# Altium PCB PCB1.PcbDoc
Units mm, origin at the board's own origin, x right, y up, seen from the top; angles counter-clockwise.
Board outline 70 x 50 mm, 4 copper layers (Top Layer, Layer 2, Layer 3, Bottom Layer), stack 1.536 mm thick; 77 components, 57 nets, 332 pads, 64 vias.
Unrouted connection lines stored in the file: 39.
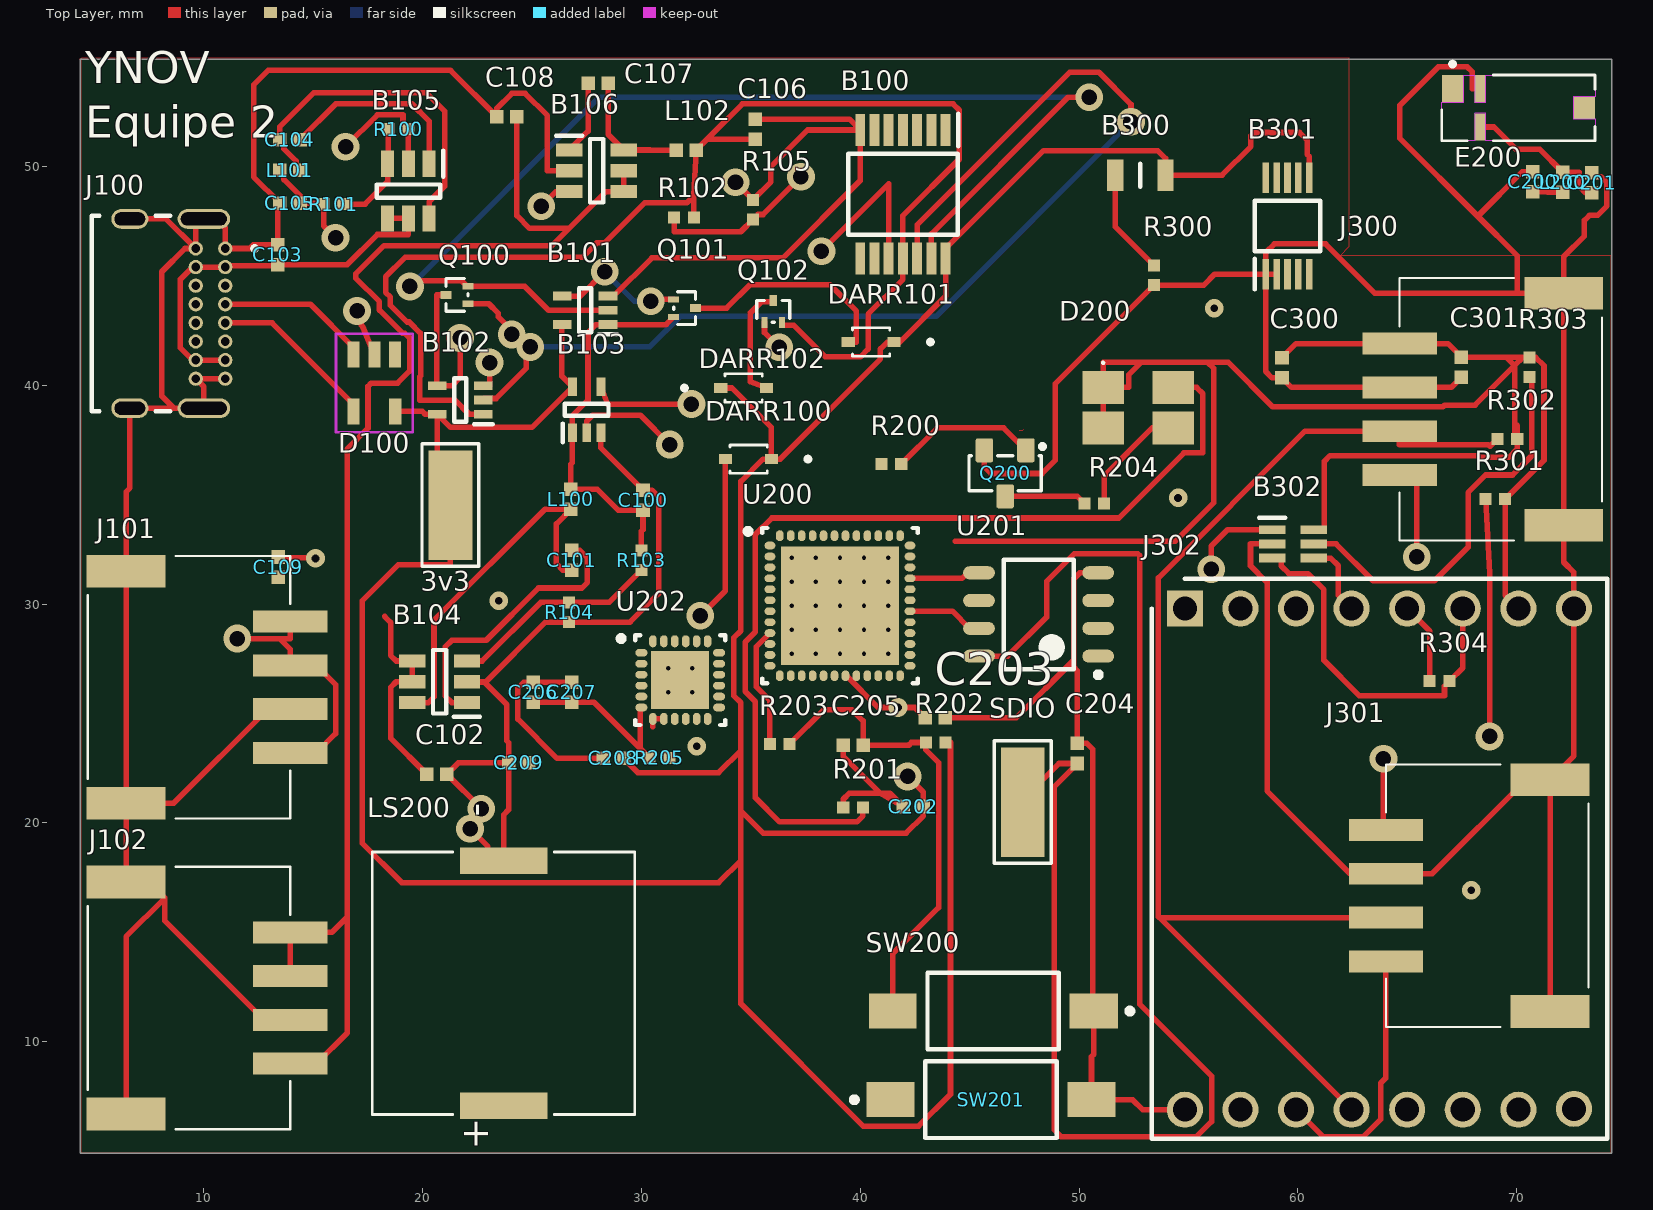
[diagram p0: Top Layer view]
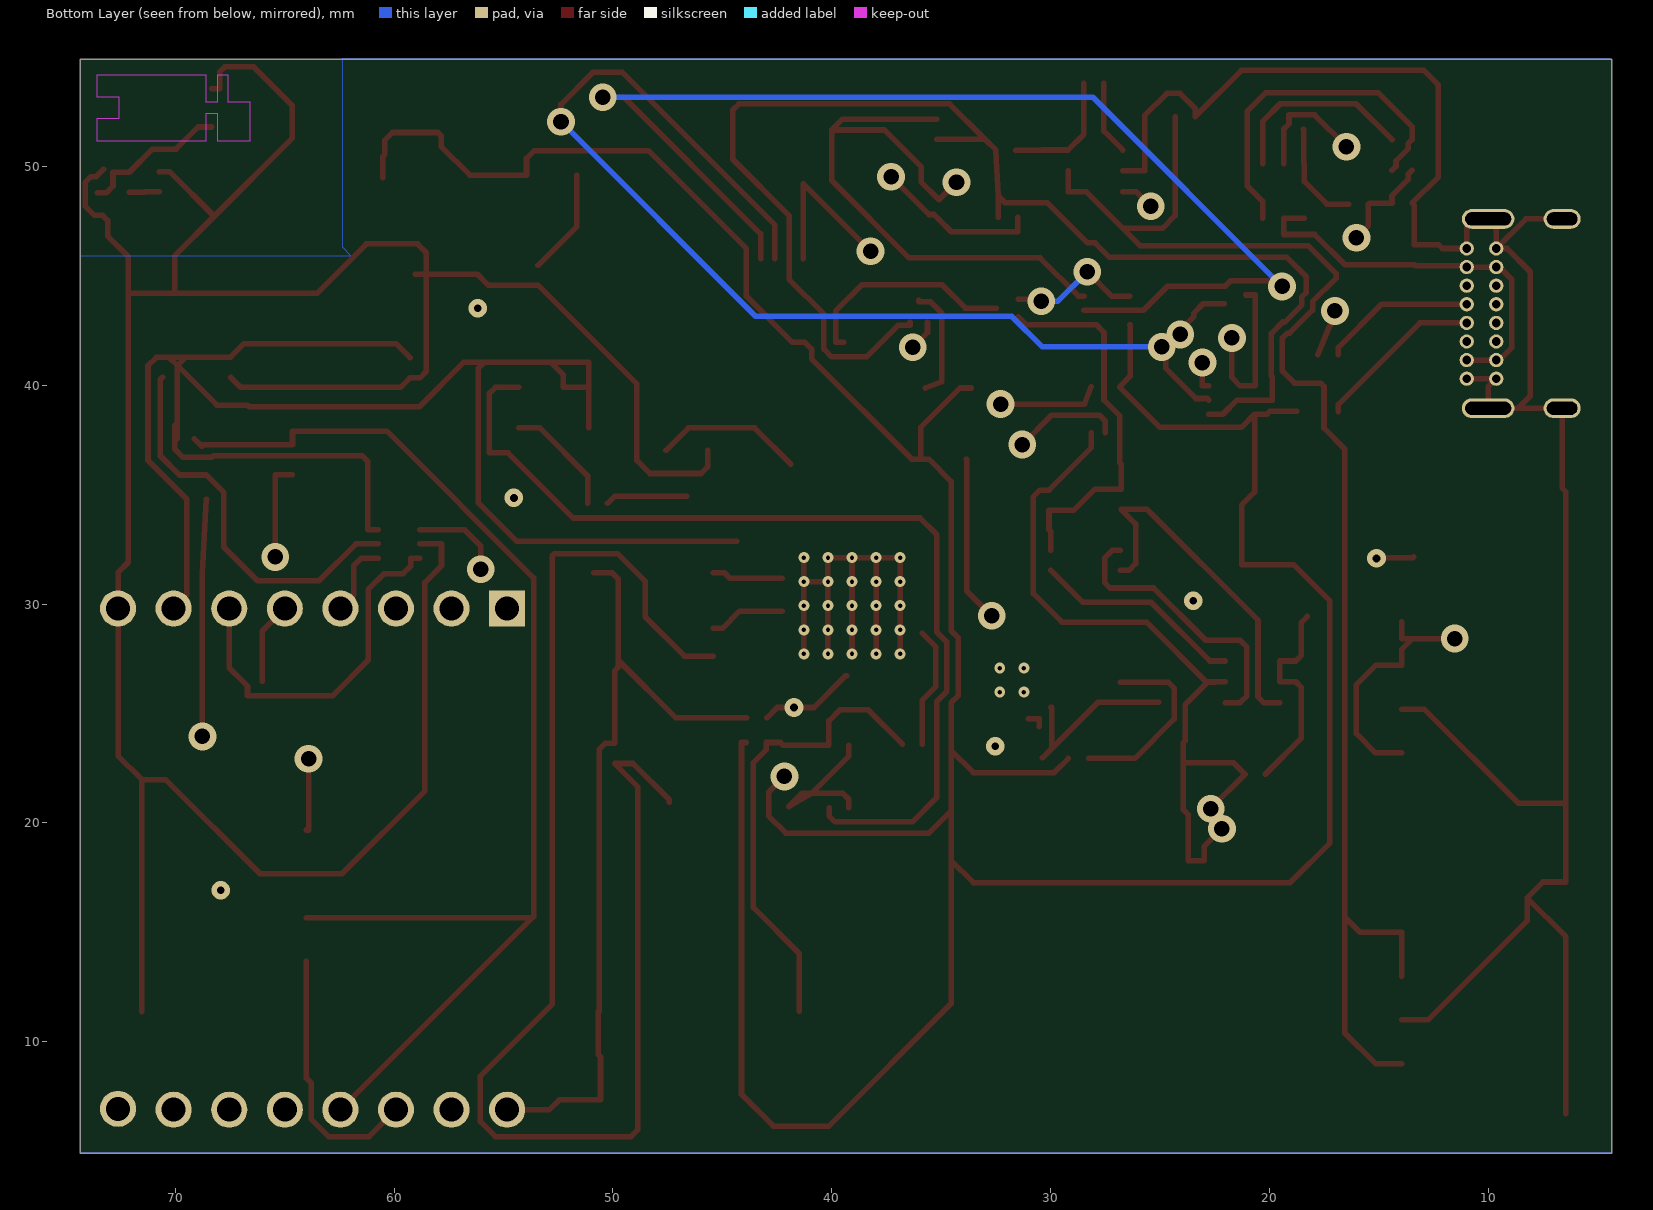
[diagram p1: Bottom Layer view, seen from below]
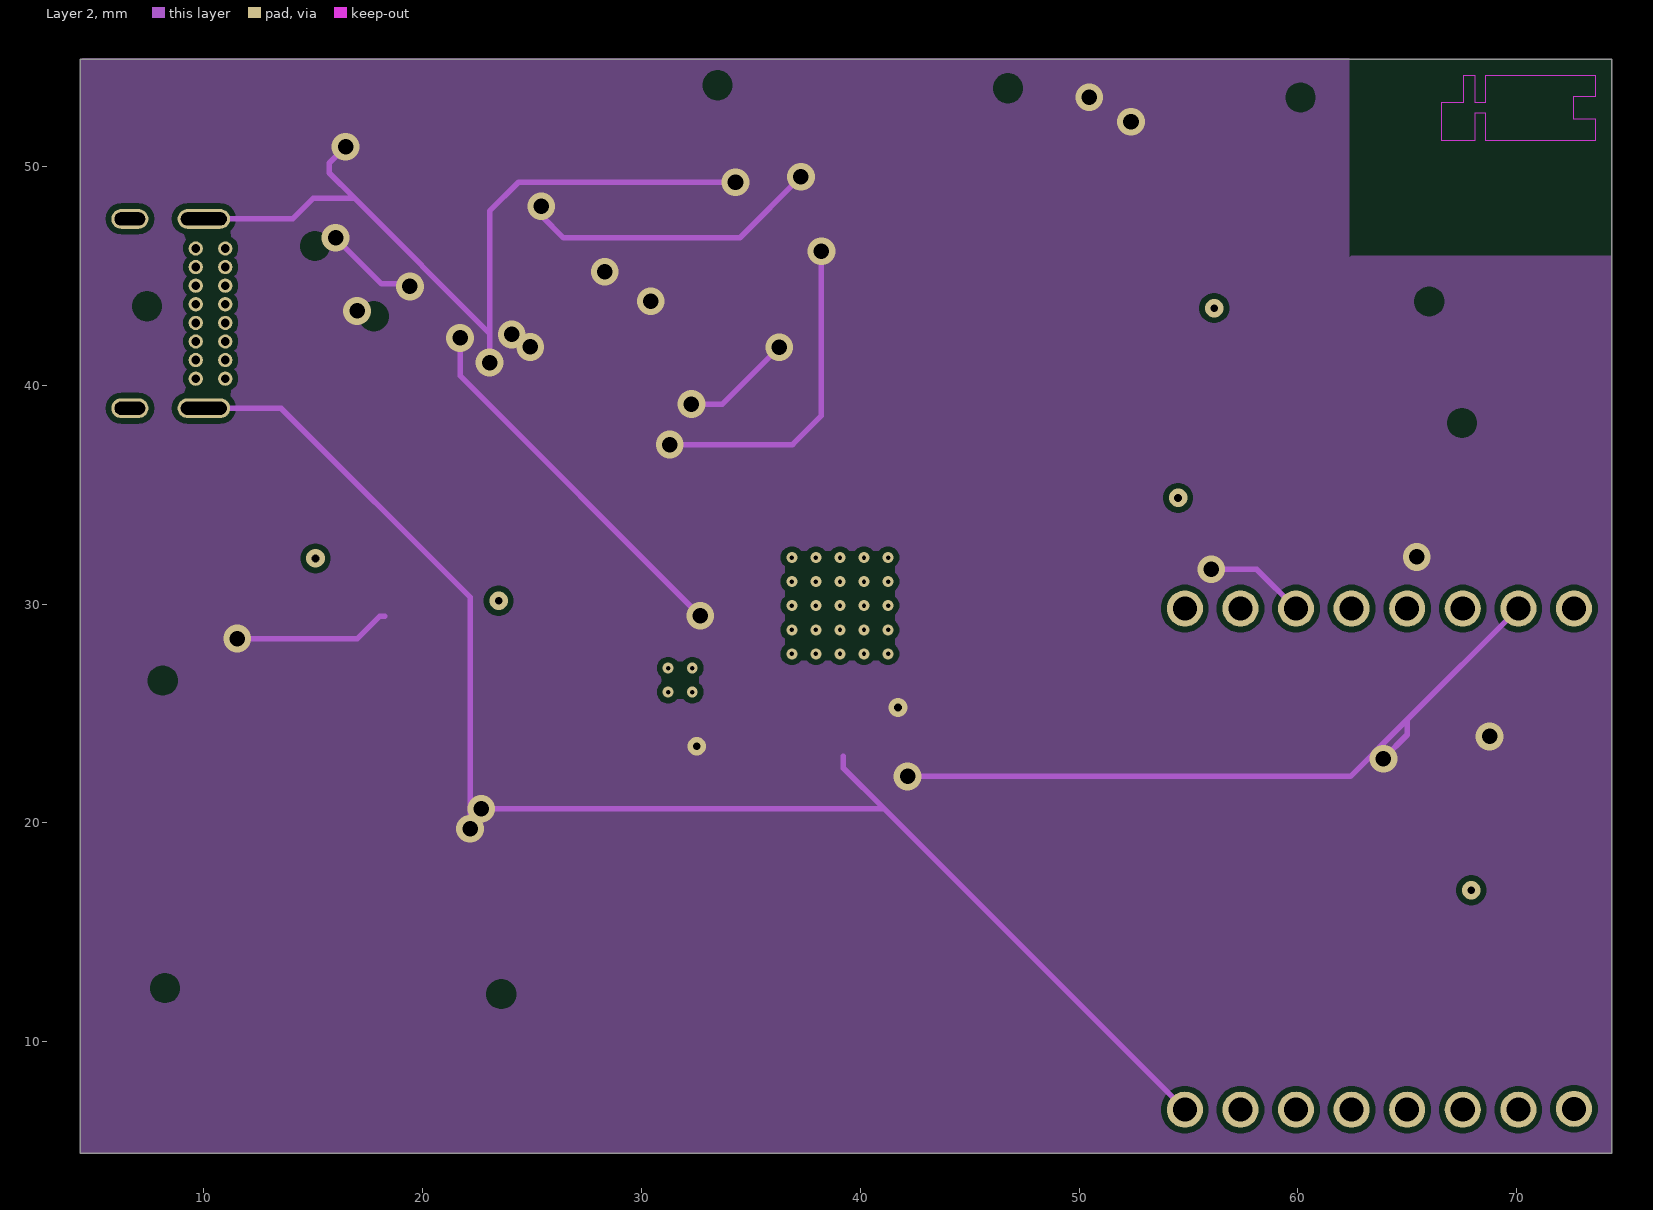
[diagram p2: Layer 2]
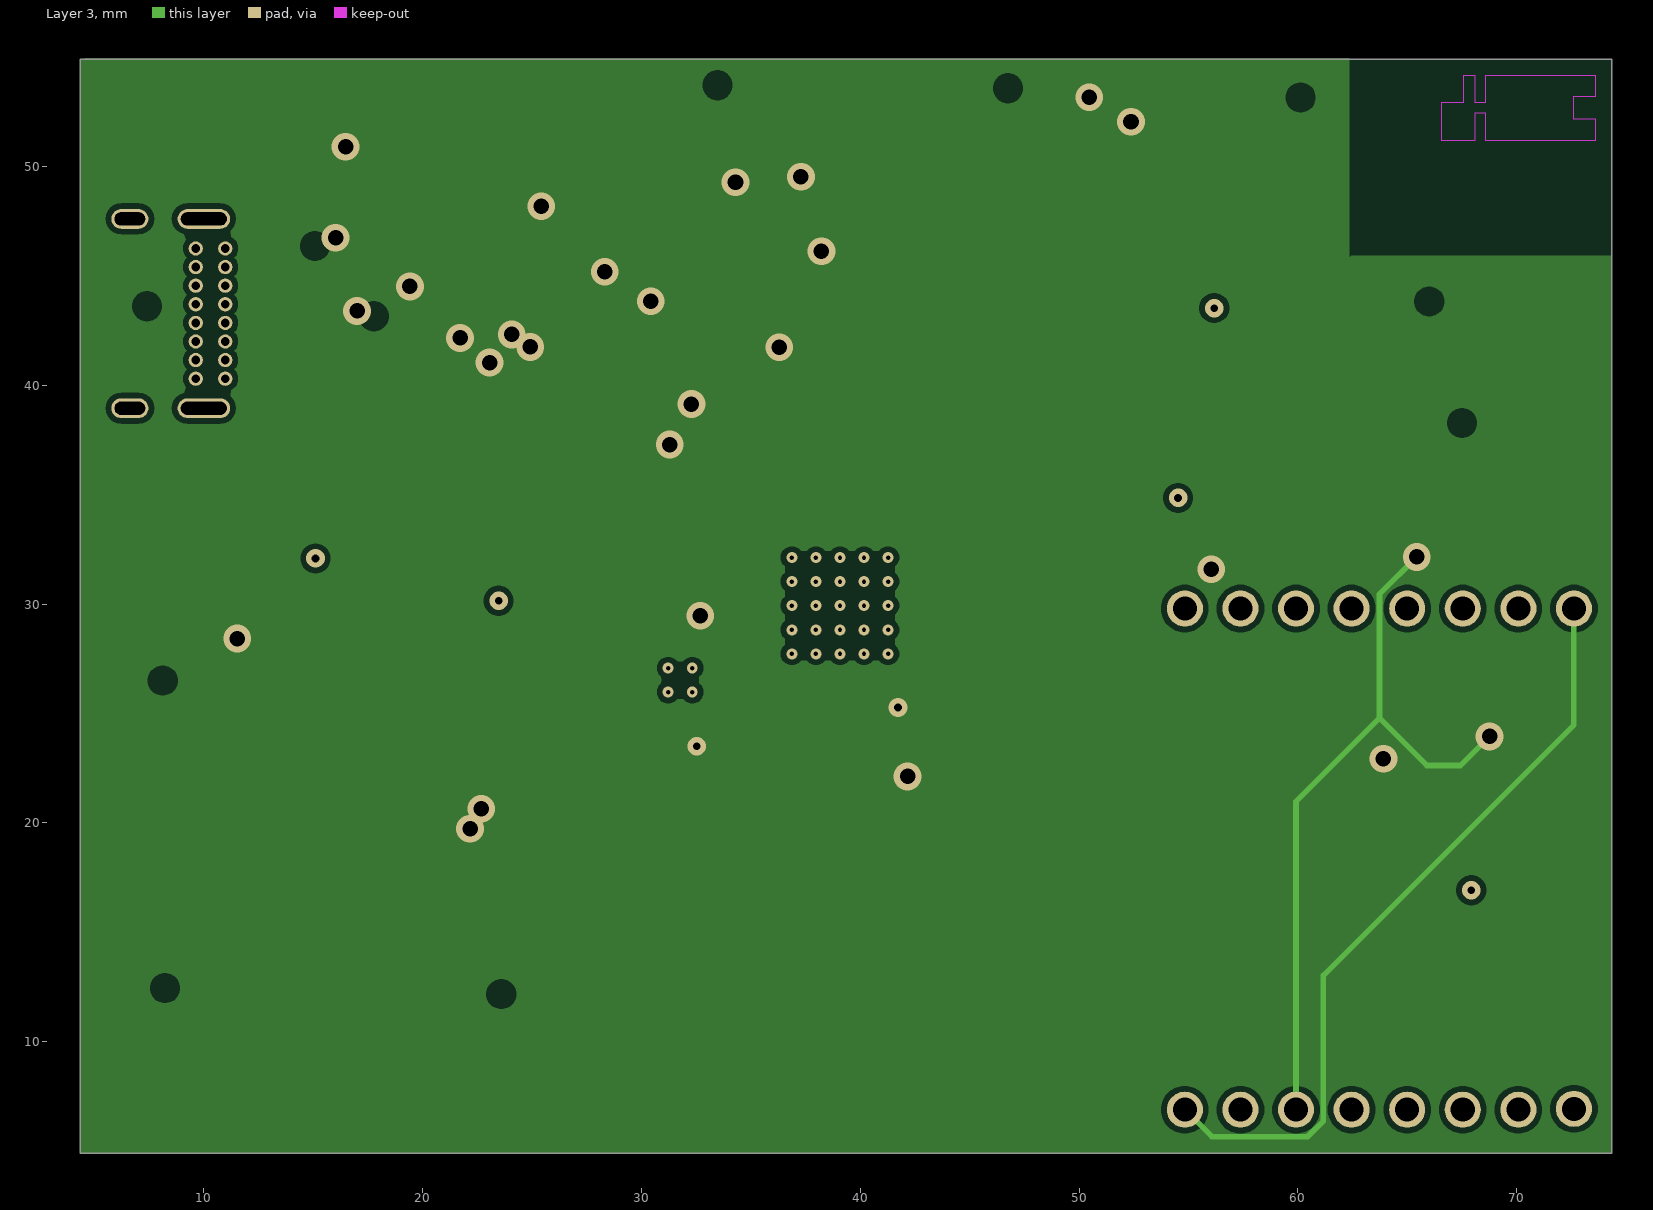
[diagram p3: Layer 3]
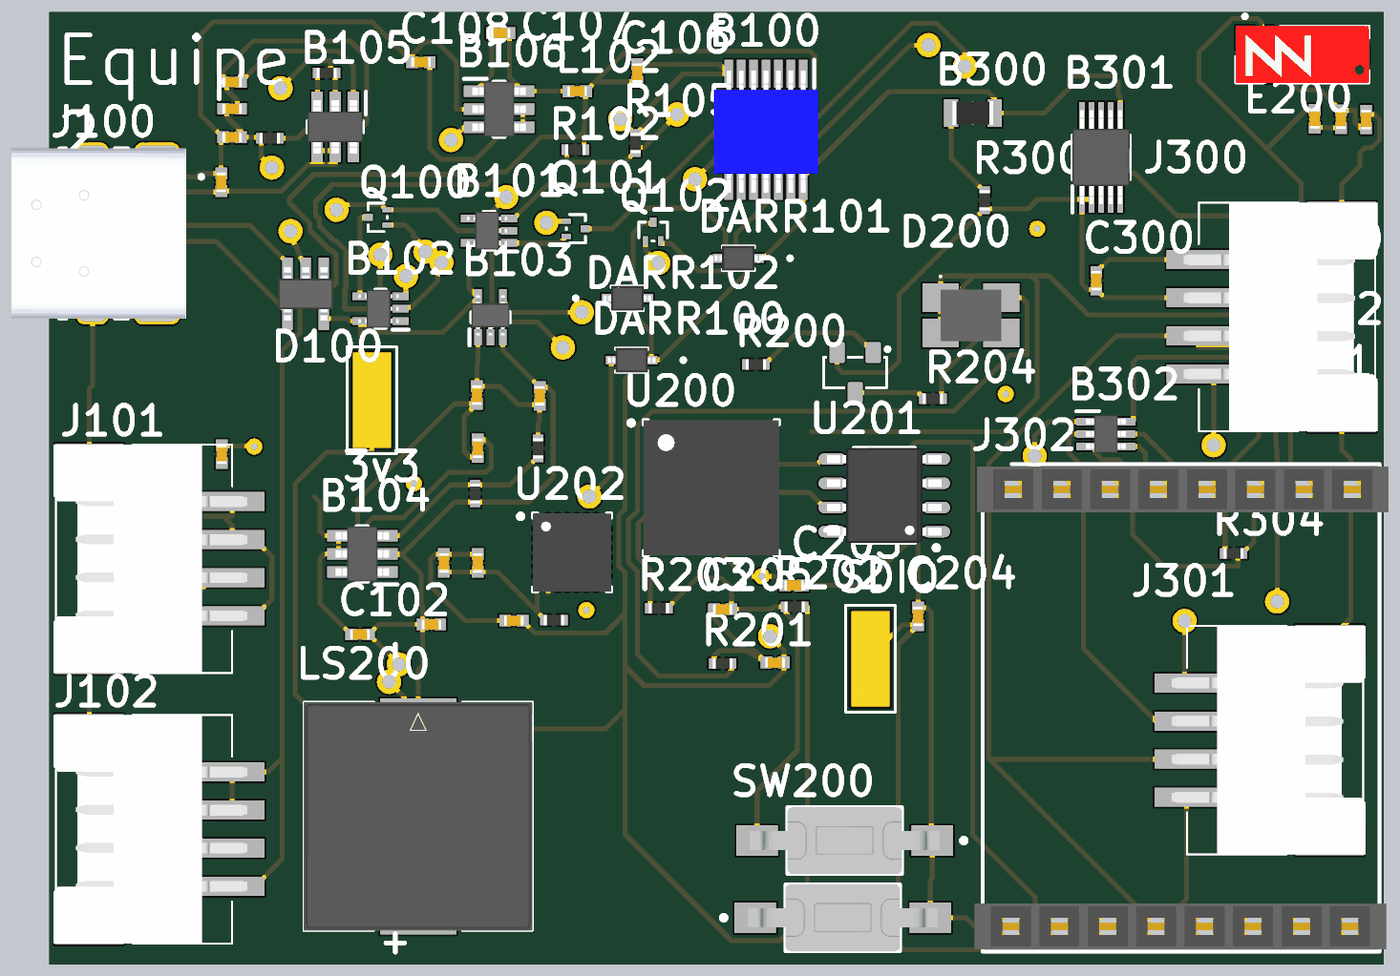
[diagram p4: 3D render of the assembled board from above, using the file's embedded part models]

## Layer stack, top to bottom
Top Solder: solder mask 0.0102, SM-001, Dk 3.5
Top Layer: signal copper 0.018
Dielectric 1: prepreg 0.36, FR-4, Dk 4.8
Layer 2: signal copper 0.035
Dielectric 2: core 0.71, FR-4, Dk 4.8
Layer 3: signal copper 0.035
Dielectric 3: prepreg 0.36, FR-4, Dk 4.8
Bottom Layer: signal copper 0.018
Bottom Solder: solder mask 0.0102, SM-001, Dk 3.5

## Board outline
4.35,4.9 74.35,4.9 74.35,54.9 4.35,54.9

## Design rules (kind name [scope] priority, off if disabled: settings)
Clearance [All] p1: gap=0.254 ignorepadtopadclearanceinfootprint=FALSE except(0: Arc-Hole Track-Hole SMDPad-Hole THPad-Hole Via-Hole Fill-Hole Poly-Hole Region-Hole Text-Hole)
PolygonConnect [All] p1: connectstyle=Relief reliefconductorwidth=0.254 reliefentries=4 polygonreliefangle="90 Angle" airgapwidth=0.254
RoutingVias [All] p1: holewidth=0.711 width=1.27 viastyle="Through Hole" minholewidth=0.711 minwidth=1.27 maxholewidth=0.711 maxwidth=1.27
SolderMaskExpansion [All] p1: expansion=0.102 istentingtop=FALSE
SupplyNets "Schematic Supply Nets_2" [InNet('GND')] p1: voltage=0.000
SupplyNets "Schematic Supply Nets_1" [InNet('GREEN LED')] p2: voltage=0.000
SupplyNets "Schematic Supply Nets" [InNet('VDD_SDIO')] p3: voltage=0.000
Width [All] p1: maxlimit=0.254 minlimit=0.254 preferedwidth=0.254
30 further rules are at their usual default settings.

## Classes and differential pairs
component class Sheet3: B300 B301 B302 C300 C301 J300 J301 J302 R300 R301 R302 R303 R304
component class Sheet2: C202 C203 C204 C205 C206 C207 C208 C209 D200 LS200 Q200 R200 R201 R202 R203 R204 R205 SDIO SW200 SW201 U200 U201 U202
component class Sheet1: B100 B101 B103 B104 B106 C100 C101 C102 C106 C107 C108 DARR100 DARR101 DARR102 J101 J102 L100 L102 Q101 Q102 R102 R103 R104 R105

## Components (designator, comment, footprint, x,y, rotation, side; value= is the part's Value field where it differs from the comment)
3v3 "Plage CMS 10x5" "Plage CMS 10x5" 21.273,34.523 r90 top
B100 "74VHC05FT" SOP65P640X120-14N 41.95,48.725 r270 top
B101 "MC74VHC1GT08DFT2G" SOT65P210X110-5N 27.425,43.424 r180 top
B102 "MC74VHC1GT08DFT2G" SOT65P210X110-5N 21.725,39.325 r180 top
B103 "MC74VHC1GT32DFT1G" SOT65P210X110-5N 27.5,38.875 r90 top
B104 "LMR50410Y3FQDBVRQ1" SOT95P280X145-6N 20.775,26.45 r180 top
B105 "LMR50410Y3FQDBVRQ1" SOT95P280X145-6N 19.35,48.875 r270 top
B106 "LMR50410Y3FQDBVRQ1" SOT95P280X145-6N 27.95,49.8 r0 top
B300 "NB12K00103JBB" RESC2212X50N 52.8,49.6 r180 top
B301 "INA237AIDGST" SOP50P490X110-10N 59.525,47.275 r90 top
B302 "TMP126DCKR" SOT65P210X110-6N 59.775,32.75 r0 top
C100 "22uF" CAPC1005X06N 30.075,34.75 r90 top
C101 "47uF" CAPC1005X06N 26.825,32 r90 top
C102 "10uF" CAPC1005X06N 20.65,22.225 r0 top
C103 "10uF" CAPC1005X06N 13.375,45.965 r90 top
C104 "47uF" CAPC1005X06N 13.94,51.225 r0 top
C105 "22uF" CAPC1005X06N 13.94,48.325 r180 top
C106 "22uF" CAPC1005X06N 35.199,51.7 r90 top
C107 "47uF" CAPC1005X06N 28.025,53.8 r180 top
C108 "10uF" CAPC1005X06N 23.85,52.275 r180 top
C109 "10uF" CAPC1005X06N 13.4,31.69 r90 top (schematic designator C103)
C200 "1.5pF" CAPC1005X06N 70.729,49.3 r90 top
C201 "1.2pF" CAPC1005X06N 73.429,49.255 r90 top
C202 "0.1uF/6.3V(10%)" CAPC1005X06N 42.425,20.75 r180 top
C203 "1uF/6.3V(10%)" CAPC1005X06N 43.425,24.8 r0 top
C204 "0.1uF/6.3V(10%)" CAPC1005X06N 49.925,23.175 r90 top
C205 "0.1uF/6.3V(10%)" CAPC1005X06N 39.675,23.55 r180 top
C206 "1uF" CAPC1005X06N 25.05,25.975 r90 top
C207 "0.1uF" CAPC1005X06N 26.825,25.975 r90 top
C208 "1uF" CAPC1005X06N 28.725,22.95 r180 top
C209 "4.7uF" CAPC1005X06N 24.4,22.75 r180 top
C300 "0.1uF" CAPC1005X06N 59.275,40.8 r90 top
C301 "0.1uF" CAPC1005X06N 67.475,40.825 r270 top
D100 "824011" 824011 17.8,40.1 r180 top
D200 "598-8610-207F" 5988610207F 52.7,38.975 r0 top
DARR100 "SD103AWS-7-F" SD103AWS-7-F 34.9,36.625 r180 top
DARR101 "SD103AWS-7-F" SD103AWS-7-F 40.5,41.975 r180 top
DARR102 "SD103AWS-7-F" SD103AWS-7-F 34.675,39.875 r0 top
E200 "NN03-320" XCVR_NN03-320 70.079,52.675 r180 top
J100 "Use" USB4085-GF-A 6.625,43.275 r270 top
J101 "114020164" 114020164 10.15,26.2 r270 top
J102 "114020164" 114020164 10.15,12 r270 top
J300 "114020164" 114020164 68.45,38.9 r90 top
J301 "114020164" 114020164 67.825,16.675 r90 top
J302 "825433-8" Connect-Mikronus 54.835,29.795 r0 top
L100 "4.7uH" LQPC1005X06N 29.575,32 r270 top
L101 "4.7uH" LQPC1005X06N 11.146,47.031 r180 top
L102 "4.7uH" LQPC1005X06N 29.25,47.949 r180 top
L200 "1.8nH" LQPC1005X06N 69.31,52.069 r90 top
LS200 "PKLCS1212E40A1-R1" SPKR_PKLCS1212E40A1-R1 23.7,12.675 r90 top
Q100 "SI3139K-TP" SI3139K-TP 21.575,44.125 r90 top
Q101 "SI3139K-TP" SI3139K-TP 31.975,43.525 r270 top
Q102 "SI3139K-TP" SI3139K-TP 36.025,43.375 r0 top
Q200 "SS8050-G" SS8050-G 46.625,35.975 r180 top
R100 "10KΩ" RESC1005X06N 18.9,51.7 r180 top
R101 "40KΩ" RESC1005X06N 15.925,48.275 r180 top
R102 "40KΩ" RESC1005X06N 31.95,47.675 r0 top
R103 "40KΩ" RESC1005X06N 30,32 r90 top
R104 "10KΩ" RESC1005X06N 26.7,29.625 r90 top
R105 "10KΩ" RESC1005X06N 35.1,48.025 r270 top
R200 "10KΩ(5%)" RESC1005X06N 41.425,36.4 r180 top
R201 "68Ω" RESC1005X06N 39.675,20.7 r180 top
R202 "10KΩ(5%)" RESC1005X06N 43.45,23.675 r0 top
R203 "0Ω" RESC1005X06N 36.325,23.6 r180 top
R204 "68Ω" RESC1005X06N 50.7,34.6 r180 top
R205 "4.7kΩ" RESC1005X06N 30.825,22.975 r0 top
R300 "10KΩ" RESC1005X06N 53.425,45.025 r270 top
R301 "4.7KΩ" RESC1005X06N 69.025,34.8 r0 top
R302 "4.7KΩ" RESC1005X06N 69.575,37.55 r0 top
R303 "10KΩ" RESC1005X06N 70.575,40.825 r90 top
R304 "10KΩ" RESC1005X06N 66.475,26.475 r0 top
SDIO "Plage CMS 10x5" "Plage CMS 10x5" 47.425,20.95 r90 top
SW200 "FSMSM" TECO-FSMSM-2_V 46.075,11.4 r180 top
SW201 "FSMSM" TECO-FSMSM-2_V 45.975,7.35 r0 top
U200 "ESP32-PICO-D4" PQFN50P700X700X104_HS-49N 39.075,29.925 r0 top
U201 "IS66WVS1M8BLL-104NLI" SOIC127P600X175-8N 48.15,29.525 r180 top
U202 "CP2104-F03-GM" PQFN50P400X400X80_HS-25N 31.775,26.525 r0 top

## Footprints (in the part's own frame and the unit in brackets; to place one, negate y for a bottom-side part, rotate by r counter-clockwise, add the part's x,y. Pads: shape width x height; smd on the part's side, far side on the other; paste and mask are expansions set on the pad)
824011 [mm] "Suppresseurs ESD / diodes TVS WE-TVS High Speed 5uA 5VDC 2+1"
  rect 0.55x1.2 smd: 1(-0.95,-1.3) 2(0,-1.3) 3(0.95,-1.3) 4(0.95,1.3) 5(-0.953,1.295)
  Top Layer keep-out lines w0.127: 1.75,2.25 -1.75,2.25 -1.75,-2.25 1.75,-2.25 1.75,2.25
  body extent -1.45,-1.4 1.45,1.4, height 1.45
114020164 [mm]
  rect 1x3.4 smd: 1(-3,3.8) 2(-1,3.8) 3(1,3.8) 4(3,3.8)
  rect 1.5x3.6 smd: MP1(-5.3,-3.7) MP2(5.3,-3.7)
  silkscreen extent -6,-5.45 6,3.8, body extent -6,-5.59 6,4.6, height 5.2
5988610207F [mm]
  rect 1.9x1.5 smd: 1(-1.6,0.925) 2(1.6,0.925) 3(-1.6,-0.925) 4(1.6,-0.925)
  silkscreen extent -1.65,2 -1.55,2.1, body extent -1.6,-1.35 1.6,1.35, height 0.9
CAPC1005X06N [mm] "Chip Capacitor, 2-Leads, Body 1,00x0,50mm, IPC Medium Density"
  rect 0.62x0.62 smd: 1(-0.46,0) 2(0.46,0)
  body extent -0.53,-0.28 0.53,0.28, height 0.55
Connect-Mikronus [mm]
  rect 1.65x1.65 / inner round 1.65 / far side rect 1.65x1.65 hole 1.1: 1(0,0)
  round 1.65 hole 1.1: 2(2.54,0) 3(5.08,0) 4(7.62,0) 5(10.16,0) 6(12.7,0) 7(15.24,0) 8(17.78,0) 9(17.78,-22.86) 10(15.24,-22.9) 11(12.7,-22.9) 12(10.16,-22.9) 13(7.62,-22.9) 14(5.08,-22.9) 15(2.54,-22.9) 16(0,-22.9)
  silkscreen extent -1.52,-24.22 19.3,1.37, body extent -1.95,-24.1 19.78,1.25, height 8.5
LQPC1005X06N [mm]
  rect 0.62x0.62 smd: 1(-3.254,-2.794) 2(-2.334,-2.794)
  body extent -3.32,-3.07 -2.27,-2.52, height 0.55
"Plage CMS 10x5" [mm] "Plage CMS 10x5"
  rect 5x2 smd paste-1 mask+0.15: 1(0,0)
  silkscreen extent -2.8,-1.3 2.8,1.3
PQFN50P400X400X80_HS-25N [mm] "PQFN, 24-Leads, Body 4,00x4,00mm, Pitch 0,50mm, Thermal Pad 2,65x2,65mm, IPC Medium Density"
  oval 0.55x0.35 smd: 1(-1.775,1.25) 2(-1.775,0.75) 3(-1.775,0.25) 4(-1.775,-0.25) 5(-1.775,-0.75) 6(-1.775,-1.25) 13(1.775,-1.25) 14(1.775,-0.75) 15(1.775,-0.25) 16(1.775,0.25) 17(1.775,0.75) 18(1.775,1.25)
  oval 0.35x0.55 smd: 7(-1.25,-1.775) 8(-0.75,-1.775) 9(-0.25,-1.775) 10(0.25,-1.775) 11(0.75,-1.775) 12(1.25,-1.775) 19(1.25,1.775) 20(0.75,1.775) 21(0.25,1.775) 22(-0.25,1.775) 23(-0.75,1.775) 24(-1.25,1.775)
  rect 2.65x2.65 smd: 25(0,0)
  silkscreen extent -2.82,-2.05 2.05,2.05, body extent -2.05,-2.05 2.05,2.05, height 0.8
PQFN50P700X700X104_HS-49N [mm] "PQFN, 48-Leads, Body 7,00x7,00mm, Pitch 0,50mm, Thermal Pad 5,40x5,40mm, IPC Medium Density"
  oval 0.5x0.35 smd: 1(-3.2,2.75) 2(-3.2,2.25) 3(-3.2,1.75) 4(-3.2,1.25) 5(-3.2,0.75) 6(-3.2,0.25) 7(-3.2,-0.25) 8(-3.2,-0.75) 9(-3.2,-1.25) 10(-3.2,-1.75) 11(-3.2,-2.25) 12(-3.2,-2.75) 25(3.2,-2.75) 26(3.2,-2.25) 27(3.2,-1.75) 28(3.2,-1.25) 29(3.2,-0.75) 30(3.2,-0.25) 31(3.2,0.25) 32(3.2,0.75) 33(3.2,1.25) 34(3.2,1.75) 35(3.2,2.25) 36(3.2,2.75)
  oval 0.35x0.5 smd: 13(-2.75,-3.2) 14(-2.25,-3.2) 15(-1.75,-3.2) 16(-1.25,-3.2) 17(-0.75,-3.2) 18(-0.25,-3.2) 19(0.25,-3.2) 20(0.75,-3.2) 21(1.25,-3.2) 22(1.75,-3.2) 23(2.25,-3.2) 24(2.75,-3.2) 37(2.75,3.2) 38(2.25,3.2) 39(1.75,3.2) 40(1.25,3.2) 41(0.75,3.2) 42(0.25,3.2) 43(-0.25,3.2) 44(-0.75,3.2) 45(-1.25,3.2) 46(-1.75,3.2) 47(-2.25,3.2) 48(-2.75,3.2)
  rect 5.4x5.4 smd: 49(0,0)
  silkscreen extent -4.32,-3.55 3.55,3.55, body extent -3.55,-3.55 3.55,3.55, height 1.04
RESC1005X06N [mm] "Chip Resistor, 2-Leads, Body 1,00x0,50mm, IPC Medium Density"
  rect 0.55x0.55 smd: 1(-0.45,0) 2(0.45,0)
  body extent -0.53,-0.28 0.53,0.28, height 0.55
RESC2212X50N [mm]
  rect 0.75x1.45 smd: 1(-1.15,0) 2(1.15,0)
  silkscreen extent 0,-0.53 0,0.52, body extent -1.07,-0.63 1.07,0.63, height 0.5
SD103AWS-7-F [mm]
  rect 0.6x0.46 smd: 1(-1.05,0) 2(1.05,0)
  silkscreen extent -2.81,-0.65 0.85,0.65, body extent -1.25,-0.65 1.25,0.65, height 1.2
SI3139K-TP [mm] "MOSFET P-Channel MOSFET"
  rect 0.28x0.5 smd paste+0 mask+0.075: 1(-0.4,-0.5) 2(0.4,-0.5)
  rect 0.36x0.5 smd paste+0 mask+0.075: 3(0,0.5)
  silkscreen extent -0.75,-0.5 0.75,0.5, body extent -0.6,-0.6 0.6,0.6, height 0.55
SOIC127P600X175-8N [mm] "SOIC, 8-Leads, Body 4,90x3,90mm, Pitch 1,27mm, IPC Medium Density"
  oval 1.45x0.6 smd: 1(-2.725,1.905) 2(-2.725,0.635) 3(-2.725,-0.635) 4(-2.725,-1.905) 5(2.725,-1.905) 6(2.725,-0.635) 7(2.725,0.635) 8(2.725,1.905)
  silkscreen extent -2.85,-2.5 1.6,2.88, body extent -3,-2.5 3,2.5, height 1.75
SOP50P490X110-10N [mm]
  rect 1.4x0.3 smd: 1(-2.2,1) 2(-2.2,0.5) 3(-2.2,0) 4(-2.2,-0.5) 5(-2.2,-1) 6(2.2,-1) 7(2.2,-0.5) 8(2.2,0) 9(2.2,0.5) 10(2.2,1)
  silkscreen extent -2.9,-1.5 1.15,1.5, body extent -2.46,-1.5 2.46,1.5, height 1.06
SOP65P640X120-14N [mm]
  rect 1.475x0.45 smd: 1(-2.938,1.95) 2(-2.938,1.3) 3(-2.938,0.65) 4(-2.938,0) 5(-2.938,-0.65) 6(-2.938,-1.3) 7(-2.938,-1.95) 8(2.938,-1.95) 9(2.938,-1.3) 10(2.938,-0.65) 11(2.938,0) 12(2.938,0.65) 13(2.938,1.3) 14(2.938,1.95)
  silkscreen extent -3.67,-2.5 1.85,2.52, body extent -3.1,-2.75 3.3,2.75, height 1.1
SOT65P210X110-5N [mm]
  rect 0.85x0.4 smd: 1(-1.05,0.65) 2(-1.05,0) 3(-1.05,-0.65) 4(1.05,-0.65) 5(1.05,0.65)
  silkscreen extent -1.48,-1 0.27,1.1, body extent -0.95,-1 1.15,1, height 1.1
SOT65P210X110-6N [mm]
  rect 1.2x0.4 smd: 1(-0.95,0.65) 2(-0.95,0) 3(-0.95,-0.65) 4(0.95,-0.65) 5(0.95,0) 6(0.95,0.65)
  silkscreen extent -1.55,1.2 -0.35,1.2, body extent -1.05,-1 1.05,1, height 1
SOT95P280X145-6N [mm]
  rect 1.2x0.6 smd: 1(-1.25,0.95) 2(-1.25,0) 3(-1.25,-0.95) 4(1.25,-0.95) 5(1.25,0) 6(1.25,0.95)
  silkscreen extent -1.85,-1.45 0.3,1.6, body extent -1.4,-1.45 1.4,1.45, height 1.2
SPKR_PKLCS1212E40A1-R1 [mm]
  rect 1.2x4 smd: N(5.6,0) P(-5.6,0)
  silkscreen extent -6,-6 6,6, body extent -6,-6 6,6, height 3
SS8050-G [mm]
  rrect25% 0.8x1.1 smd paste+0 mask+0.075: 1(-0.95,-1.05) 2(0.95,-1.05) 3(0,1.05)
  silkscreen extent -1.77,-1.3 1.65,0.8, body extent -1.5,-1.3 1.5,1.3, height 1.1
TECO-FSMSM-2_V [mm] "SMD, 2-Leads, Body 6x3.5mm, Pitch 9.19mm"
  rect 2.2x1.6 smd: 1(-4.595,0)
  rect 2.18x1.6 smd: 2(4.595,0)
  silkscreen extent -6.37,-1.75 3,1.75, body extent -4.98,-1.75 4.98,1.75, height 4.4
USB4085-GF-A [mm]
  round 0.65 hole 0.4: A1(-2.975,4.36) A4(-2.125,4.36) A5(-1.275,4.36) A6(-0.425,4.36) A7(0.425,4.36) A8(1.275,4.36) A9(2.125,4.36) A12(2.975,4.36) B1(2.975,3.01) B4(2.125,3.01) B5(1.275,3.01) B6(0.425,3.01) B7(-0.425,3.01) B8(-1.275,3.01) B9(-2.125,3.01) B12(-2.975,3.01)
  oval 0.9x1.7 hole 0.6 slot 1.4 at 90 deg: S1(-4.325,0) S2(4.325,0)
  oval 0.9x2.4 hole 0.6 slot 2.1 at 90 deg: S3(-4.325,3.38) S4(4.325,3.38)
  silkscreen extent -4.47,-1.74 4.47,5.8, body extent -4.47,-4.25 4.47,4.92, height 3.46
XCVR_NN03-320 [mm]
  rect 1x1 smd: 1(-3,0)
  rect 0.5x1.25 smd: 2(1.75,-0.875) 3(1.75,0.875)
  rect 1x1.25 smd: 4(3,-0.875)
  Keep-Out Layer region: 3.5,-0.25 2.5,-0.25 2.5,-1.5 2,-1.5 2,-0.25 1.5,-0.25 1.5,-1.5 -3.5,-1.5 -3.5,-0.5 -2.5,-0.5 -2.5,0.5 -3.5,0.5 -3.5,1.5 1.5,1.5 1.5,0.25 2,0.25 2,1.5 3.5,1.5
  silkscreen extent -3.5,-2.1 3.5,1.5, body extent -3.5,-1.5 3.5,1.5, height 2.02

## Part data
3v3 SDIO: "Plage de report CMS 10x5mm", Footprint_statut=ok, PN=L30
B100: "Logic Gates CMOS LOGIC IC INVERTER", Manufacturer_Name=Toshiba, Mouser Part Number=757-74VHC05FT, Manufacturer_Part_Number=74VHC05FT
B101 B102: "Single 2-Input AND Gate, TTL Level", Manufacturer_Name=onsemi, Manufacturer_Part_Number=MC74VHC1GT08DFT2G
B103: "Single 2-Input OR Gate, TTL Level", Manufacturer_Name=onsemi, Mouser Part Number=863-C74VHC1GT32DFT1G, Manufacturer_Part_Number=MC74VHC1GT32DFT1G
B104 B105 B106: "Régulateurs de tension de commutation Automotive qualified SIMPLE SWITCHER 4-V to 36-V, 1-A synchronous step-down converter 6-SOT-23 -40 to 150", Manufacturer_Name="Texas Instruments", Mouser Part Number=595-R50410Y3FQDBVRQ1, Manufacturer_Part_Number=LMR50410Y3FQDBVRQ1
B300: "NTC SMD Thermistor, NB12K, 10K, 5% AVX 10k 0805 Protection NTC Thermistor, 5s, 2 x 1.25 x 1.3mm", Manufacturer_Name="Kyocera AVX", Mouser Part Number=581-NB12K00103JBB, Arrow Part Number=NB12K00103JBB, Arrow Price/Stock=https://www.arrow.com/en/products/nb12k00103jbb/avx, Datasheet Link=https://datasheet.datasheetarchive.com/originals/distributors/Datasheets-DGA6/551314.pdf, Geometry.Height=0.5mm, Manufacturer_Part_Number=NB12K00103JBB, Mouser Price/Stock=https://www.mouser.co.uk/ProductDetail/AVX/NB12K00103JBB/?qs=4%252B6%252BTdINQeDPvI%252BQUQjJ3Q%3D%3D
B301: "Current Sense Amplifiers 85-V, 16-bit, I2C output current/voltage/power monitor with alert 10-VSSOP -40 to 125", Manufacturer_Name="Texas Instruments", Mouser Part Number=595-INA237AIDGST, Manufacturer_Part_Number=INA237AIDGST
B302: "Board Mount Temperature Sensors +/-0.25 C SPI temperature sensor with 175 C operation, CRC and slew-rate alert", Manufacturer_Name="Texas Instruments", Mouser Part Number=595-TMP126DCKR, Manufacturer_Part_Number=TMP126DCKR
C100 C101 C102 C103 C104 C105 C106 C107 C108 C109 C200 C201 C202 C203 C204 C205 C206 C207 C208 C209 C300 C301: library part Capacitor
D100: "TVS Diode Array WE-TVS, High Speed Series  - Low capazity - No leakage current - Low clamping voltage - high ESD voltage protection  -- USB 1.0 - 2.0"
D200: "Standard LEDs - SMD Red/Green WC 80/50mcd 645/570nm", Manufacturer_Name=Dialight, Mouser Part Number=645-598-8610-207F, Arrow Part Number=598-8610-207F, Arrow Price/Stock=https://www.arrow.com/en/products/598-8610-207f/dialight?region=nac, Datasheet Link=https://media.digikey.com/pdf/Data%20Sheets/Dialight%20PDFs/598%20Series%201210%20Pkg%20Bi-Color.pdf, Geometry.Height=0.8mm, Manufacturer_Part_Number=598-8610-207F, Mouser Price/Stock=https://www.mouser.co.uk/ProductDetail/Dialight/598-8610-207F?qs=7JStj%2FjQ2SFuCjosqwklHQ%3D%3D
DARR100 DARR101 DARR102: "Diode Array 3 Independent Schottky 40V 175mA Surface Mount 6-TSSOP, SC-88, SOT-363"
E200: "Dual port antenna booster for GNSS, Bluetooth, 5G and UWB (1561 - 1606MHz, 2400 - 2500MHz, 3400 - 3800MHz, 3100 - 4800MHz and 6000 - 10600 MHz), signal booster", Manufacturer_Name=Ignion, Mouser Part Number=128-NN03-320, Manufacturer_Part_Number=NN03-320
J100: library part USB4085-GF-A, "Connecteurs USB USB Type C, 2.0, Rec, TH , G/F, RA , Top Mnt, T & R"
J101 J102 J300 J301: "Seeed Studio Accessories Grove Female Header - SMD-4P-2.0mm-90D-20Pcs", Manufacturer_Name="Seeed Studio", Mouser Part Number=713-114020164, Manufacturer_Part_Number=114020164
J302: library part Connect-Mikrobus, "Headers & Wire Housings 8P double for connection mikrobus", Manufacturer_Name="TE Connectivity", Mouser Part Number=571-825433-8, Manufacturer_Part_Number=825433-8
L100 L101 L102 L200: library part Bobine
LS200: "Buzzers Transducer, Externally Driven Piezo 1.5V 2kHz 70dB @ 1.5V, 10cm Surface Mount Solder Pads", Package=None, Availability=Unavailable, MF="Murata Electronics", MP=PKLCS1212E40A1-R1, Price=None
Q100 Q101 Q102: "MOSFET P-Channel MOSFET"
Q200: "Bipolar Transistors - BJT NPN TRANSISTOR 1.5A 40V"
R100 R101 R102 R103 R104 R105 R200 R201 R202 R203 R204 R205 R300 R301 R302 R303 R304: library part Resistor
SW200 SW201: library part CMP-2000-07511-1, "FSMSM Push Button Switch, 50 mA, -35 to 85 degC, 2-Pin SMD, RoHS, Bulk", Case\/Package=SMD/SMT, Contact Current Rating=50mA, Contact Resistance=100mOhm, Manufacturer="TE Connectivity", Max Operating Temperature=85degC, Max Voltage Rating (DC)=12V, Min Operating Temperature=-35degC, Operating Force=180gf, Package Description="2-Pin Surface Mount Device, Body 6 x 3.5 mm, Pitch 9.19 mm", Package Quantity=1000, Voltage Rating (DC)=24V, Actuator Length=1.07mm, Actuator Material=Polyamide, Contact Material=Brass, Contact Plating=Silver, Current Rating=50mA, Datasheet URL=http://www.te.com/commerce/DocumentDelivery/DDEController?Action=showdoc&DocId=Customer+Drawing%7F1437566-3%7FC2%7Fpdf%7FEnglish%7FENG_CD_1437566-3_C2_1437566_3_1_c.dwg.pdf%7F1437566-3, Datasheet Version="Rev. C2, 08/2014", Electrical Life=20000Cycles, ELV=Compliant, Illumination Type=Illuminated, Lead Free=LeadFree, Manufacturer URL=http://www.te.com/, Mechanical Life=20000Cycles, Mount=SurfaceMount, Mounting Technology=SurfaceMount, Orientation=Straight, Package Reference=FSMSM, Packaging=LoosePiece, REACH SVHC=Unknown, RoHSCompliant=true, Switch Travel=0.25mm, Termination=GullWing, Throw Configuration=SPST
U200: library part ESP32, "Système RF sur puce - SoC SIP module ESP32 with 4MByte Flash, Dual Core MCU, Wi-Fi & Bluetooth Combo, LGA48-pin, 7*7mm", Manufacturer 1="Espressif Systems", Supplier Part Number 1=1904-1029-1-ND, Manufacturer Part Number 1=ESP32-PICO-D4, Supplier 1=Digi-Key
U201: library part SRAM, "SRAM 8Mb, SerialRAM, 2.7V-3.6V, 104MHz, 8 pin SOIC 150 mil, RoHS", Manufacturer 1=ISSI, Supplier Part Number 1=706-IS66WVS1M8BLL-104NLI-ND, Manufactuer Part Number 1=IS66WVS1M8BLL-104NLI, Supplier 1=Digi-Key
U202: library part USBBridge, "USB Bridge, USB to UART USB 2.0 UART Interface 24-QFN (4x4)", Manufacturer 1="Silicon Labs", Manufacturer Part Number 1=CP2104-F03-GM, Supplier 1="Arrow Electronics", Supplier Part Number 1=CP2104-F03-GM

## Via types
v1: diameter 0.5, hole 0.2, Top Layer to Bottom Layer, 29 vias
v2: diameter 1.27, hole 0.711, Top Layer to Bottom Layer, 28 vias
v3: diameter 0.85, hole 0.35, Top Layer to Bottom Layer, 7 vias

## Nets (pads, with @x,y where several pads share a name; then routed paths per layer and width w, separated by ;. In a path a pad name is that pad's centre, name@x,y a point inside that pad or via, vN(x,y) a via of type N, cw(c..) or ccw(c..) an arc to the next point about the centre after c; other vN are vias at no path point)
"3V3 BT FINAL": DARR101.2 Q101.3 | length 10.1
  Top Layer w0.254: Q101.3 33.898,43.525 34.976,44.602 38.608,44.602 39.827,43.383 39.827,41.975 DARR101.2
"3V3 Depuis BT": B101.1 B103.1 C100.1 L100.1 Q101.2 R103.2 | length 17.3
  Top Layer w0.254: R103.2 30,33.325 30.075,33.4 C100.1 28.941,34.29 27.977,35.254 L100.1 26.781,36.399 26.85,36.467 B103.1 26.85,38.608 27.559,39.317 27.559,42.418 27.915,42.774 B101.1 31.125,42.774 Q101.2
"3V3 Depuis HT": B100.11 B102.1 C106.1 L102.1 Q102.2 R102.2 | length 60.9
  Top Layer w0.254: B102.1 22.133,38.675 21.488,39.319 19.863,39.319 19.863,40.381 19.914,40.432 19.914,42.368 19.393,42.889 19.29,42.889 18.531,43.648 18.531,44.029 18.313,44.247 18.313,44.958 19.202,45.847 27.304,45.847 27.964,46.507 28.32,46.507 30.15,48.336 32.072,48.336 32.4,48.664 ; R102.2 32.4,48.664 ; C106.1 33.001,51.24 ; Q102.2 36.425,42.748 36.957,42.748 38.405,41.3 40.005,41.3 40.361,41.656 40.361,43.249 41.95,44.838 B100.11 41.95,47.752 44.526,50.328 44.526,52.578 44.247,52.857 34.618,52.857 33.001,51.24 ; 32.4,48.664 L102.1 33.001,51.24
"3V3 Depuis HT INVERT": B100.10 B103.2 | length 27.8
  Top Layer w0.254: B103.2 27.5,38.354 27.777,38.631 29.949,38.631 v2(31.293,37.287) ; v2(38.227,46.126) 41.3,49.199 B100.10
  Layer 2 w0.254: v2(31.293,37.287) 36.906,37.287 38.227,38.608 v2(38.227,46.126)
"3V3 Depuis USB": B100.13 B101.2 C105.1 L101.2 Q100.2 R101.2 | length 64.3
  Top Layer w0.254: L101.2 13.663,49.642 13.663,49.403 14.4,48.666 C105.1 15.425,48.325 R101.2 15.475,47.288 v2(16.027,46.736) ; v2(19.422,44.517) 19.685,44.78 21.767,44.78 22.022,44.525 Q100.2 24.665,44.525 25.765,43.424 B101.2 ; B100.13 43.25,46.914 49.498,53.162 v2(50.47,53.162)
  Layer 2 w0.254: v2(16.027,46.736) 18.131,44.632 19.308,44.632 v2(19.422,44.517)
  Bottom Layer w0.254: v2(19.422,44.517) 28.067,53.162 v2(50.47,53.162)
"3V3 HT FINAL": DARR102.2 Q102.3 | length 5.3
  Top Layer w0.254: DARR102.2 34.983,40.164 34.983,43.314 35.485,43.815 36.025,43.815 Q102.3
"3V3 USB FINAL": B102.4 DARR100.2 Q100.3 | length 32.5
  Top Layer w0.254: Q100.3 20.65,44.125 20.65,39.975 B102.4 21.336,39.975 21.717,40.356 v2(21.717,42.164) ; v2(32.69,29.464) 33.833,30.607 33.833,36.625 DARR100.2
  Layer 2 w0.254: v2(21.717,42.164) 21.717,40.437 v2(32.69,29.464)
"3V3 USB INVERT": B100.12 B102.2 Q100.1 | length 54.8
  Top Layer w0.254: Q100.1 23.026,43.725 23.456,43.296 23.456,43.138 24.079,42.515 v2(24.079,42.325) ; B102.2 22.844,39.394 23.358,39.394 24.731,40.767 24.731,41.556 v2(24.925,41.75) ; B100.12 42.6,47.324 49.581,54.305 50.902,54.305 52.375,52.832 v2(52.375,52.045)
  Bottom Layer w0.254: v2(24.079,42.325) 24.214,42.325 24.79,41.75 30.376,41.75 31.78,43.155 43.485,43.155 v2(52.375,52.045)
"36V HT": B106.4 B106.5 C108.1 J102.1 J102.2 J102.4 | length 67.6
  Top Layer w0.254: J102.4 15.15,9 16.561,10.411 16.561,15.711 ; J102.2 J102.1 15.85,15 16.561,15.711 ; C108.1 24.31,47.752 24.894,47.168 26.695,47.168 ; B106.5 B106.4 28.378,48.85 26.695,47.168 ; 16.561,15.711 16.561,37.097 17.506,38.042 17.506,39.951 17.655,40.1 18.864,40.1 19.406,40.642 19.406,42.158 19.183,42.381 19.08,42.381 18.023,43.438 18.023,43.819 16.955,44.887 16.955,45.098 18.237,46.38 25.908,46.38 26.695,47.168
ANTENNE: C200.1 L200.1 U200.2 | length 1.4
  Top Layer w0.254: C200.1 71.399,48.84 71.424,48.815 L200.1
BOOT: SW201.1 U200.23
"BT 2.7 TO 10V": B104.4 B104.5 C102.1 J101.1 J101.2 J101.4 | length 28.6
  Top Layer w0.254: v2(11.532,28.423) 13.467,28.423 ; J101.4 15.15,23.2 16.031,24.081 16.031,26.319 15.15,27.2 J101.2 13.95,27.94 13.467,28.423 ; J101.1 13.95,28.423 13.467,28.423 ; 18.263,29.439 18.542,29.159 18.542,27.654 18.796,27.4 B104.4 B104.5 18.796,26.45 18.542,26.196 18.542,23.873 C102.1
  Layer 2 w0.254: v2(11.532,28.423) 17.018,28.423 18.034,29.439 18.263,29.439
BUZZER: LS200.P U200.11
CLK: U200.31 U201.6
D+: D100.3 J100.A6 U202.3 | length 7
  Top Layer w0.254: J100.A6 14.875,43.7 16.85,41.725 D100.3
D-: D100.4 J100.A7 U202.4 | length 7.7
  Top Layer w0.254: J100.A7 13.125,42.85 16.85,39.125 D100.4
EN: R203.2 U200.9 | length 5.6
  Top Layer w0.254: R203.2 35.875,25.595 35.244,26.226 35.244,28.044 U200.9
GND: B100.7 B101.3 B102.3 B103.3 B104.2 B105.2 B106.2 B301.1 B301.2 B301.7 B302.2 C100.2 C102.2 C103.2 C105.2 C106.2 C108.2 C200.2 C201.2 C202.2 C203.2 C204.2 C205.2 C209.2 C300.1 C301.2 D100.2 E200.2 J100.A1 J100.A12 J100.B1 J100.B12 J100.S1 J100.S2 J100.S3 J100.S4 J101.3 J101.MP1 J101.MP2 J102.3 J102.MP1 J102.MP2 J300.3 J300.MP1 J300.MP2 J301.3 J301.MP1 J301.MP2 J302.8 J302.16 LS200.N Q200.2 R100.1 R104.1 R105.1 R201.2 R300.2 SW200.1 SW201.2 U200.49 U201.4 | length 528.3
  Top Layer w0.254: J102.MP2 6.45,14.8 J102.MP1@8.225,16.575 ; J100.S1 8.285,47.6 J100.B12 ; J100.A12 J100.B1 10.005,39.93 J100.S4 8.636,38.95 ; J102.3 12.75,11 8.225,15.525 J102.MP1@8.225,16.575 ; J101.3 12.931,25.2 8.631,20.9 J101.MP2 ; v2(16.485,50.902) 17.939,52.356 19.106,52.356 19.106,51.944 R100.1 B105.2 ; v2(17.007,43.398) 17.202,43.204 17.202,42.737 17.267,42.672 17.787,41.412 D100.2 ; v2(22.174,19.736) 22.987,18.923 22.987,18.275 LS200.N 23.7,20.371 23.94,20.611 C209.2 ; v2(22.685,20.65) C102.2 21.635,22.75 C209.2 ; B102.3 23.063,39.975 v2(23.063,41.033) ; B106.2 25.705,49.8 25.705,52.324 24.689,53.34 24.079,53.34 23.39,52.651 C108.2 21.277,54.388 12.941,54.388 12.281,53.728 12.281,49.524 C105.2 13.375,48.22 C103.2 12.265,46.425 12.09,46.25 J100.A1 10.985,47.195 10.58,47.6 J100.S3 9.933,47.6 9.635,47.302 J100.B12 ; B103.3 28.15,37.135 C100.2 30.482,35.21 30.785,34.907 30.785,30.48 29.48,29.175 R104.1 25.613,29.175 22.844,26.406 ; B101.3 28.733,44.074 30.48,45.822 36.469,45.822 40,49.352 B100.7 ; v2(34.299,49.276) R105.1 35.916,49.29 35.916,49.987 37.592,51.663 B100.7 ; C106.2 39.503,52.16 B100.7 ; v1(36.875,27.725) v1(36.875,28.825) v1(36.875,29.925) v1(36.875,31.025) v1(36.875,32.125) v1(37.975,32.125) ; v1(37.975,27.725) v1(37.975,28.825) v1(37.975,29.925) v1(37.975,31.025) v1(37.975,32.125) ; v1(39.075,27.725) v1(39.075,28.825) v1(39.075,29.925) v1(39.075,31.025) v1(39.075,32.125) ; C205.2 39.215,23.056 ; R201.2 39.225,21.082 39.504,21.361 40.909,21.361 ; 39.225,23.056 39.215,23.056 ; v1(40.175,27.725) v1(40.175,28.825) v1(40.175,29.925) v1(40.175,31.025) ; v1(41.275,27.725) v1(41.275,28.825) v1(41.275,29.925) v1(41.275,31.025) ; v1(41.275,32.125) v1(41.275,31.025) ; C203.2 47.127,24.8 49.759,27.432 ; Q200.2 45.675,36.265 45.974,35.966 48.311,35.966 48.92,36.576 48.92,40.07 R300.2 55.702,44.575 56.202,45.075 B301.1 ; U201.4 50.038,31.43 49.759,31.151 49.759,27.432 ; J302.16 52.906,6.895 52.451,7.35 SW201.2 50.57,9.322 50.67,9.422 SW200.1 50.622,11.4 50.622,23.368 50.355,23.635 C204.2 49.925,26.949 49.759,27.115 49.759,27.432 ; B302.2 57.836,32.75 57.836,31.75 58.598,30.988 58.598,21.46 62.382,17.675 J301.3 66.138,17.675 70.438,21.975 J301.MP2 ; B301.2 B301.1 ; C301.2 67.01,39.9 J300.3 59.715,39.9 C300.1 58.825,40.34 58.525,40.64 B301.1 ; E200.2 67.96,53.55 67.96,54.333 67.736,54.556 66.421,54.556 64.66,52.795 64.66,51.281 68.22,47.722 ; C200.2 70.258,49.76 68.22,47.722 ; J301.MP1 J301.MP2 ; C201.2@73.281,49.863 C201.2 73.612,49.532 73.85,49.532 74.12,49.263 74.12,48.191 73.694,47.765 73.325,47.765 73.091,47.531 73.091,46.816 72.15,45.875 J300.MP2 ; J101.MP2 J102.MP1 7.5,17.3 J102.MP1@8.225,16.575 ; J101.MP2 J101.MP1 6.45,35.128 6.625,35.303 J100.S2 8.636,38.95 ; 8.636,38.95 8.082,39.504 8.082,45.188 9.144,46.25 J100.B12 ; 22.844,26.406 23.851,25.4 23.851,23.749 23.94,23.66 C209.2 ; 22.844,26.406 22.801,26.45 B104.2 22.844,26.406 ; v1(37.975,32.125) v1(39.075,32.125) ; v1(39.075,32.125) v1(40.175,32.125) v1(40.175,31.025) ; 39.215,23.056 40.909,21.361 ; v1(40.175,31.025) v1(41.275,31.025) ; 40.909,21.361 41.353,21.361 C202.2 40.909,21.361 ; B301.1 58.525,46.053 58.928,46.457 61.265,46.457 63.521,44.2 70.028,44.2 ; 68.22,47.722 70.028,45.913 70.028,44.2 ; 70.028,44.2 J300.MP2 ; J301.MP2 72.615,23.065 J302.8 72.615,31.445 72.15,31.91 J300.MP1 J300.MP2
  Layer 2 w0.254: J100.S4 13.538,38.95 22.174,30.314 v2(22.174,19.736) ; J100.S3 14.058,47.6 15.012,48.554 16.88,48.554 ; v2(16.485,50.902) 15.734,50.151 15.734,49.699 16.88,48.554 ; v2(22.685,20.65) 41.08,20.65 ; v2(23.063,41.033) 23.063,42.371 ; v2(34.299,49.276) 24.384,49.276 23.063,47.955 23.063,42.371 ; 39.225,23.056 39.225,22.505 41.08,20.65 ; J302.16 41.08,20.65 ; 16.88,48.554 23.063,42.371
  Layer 3 w0.254: J302.16 56.066,5.664 60.452,5.664 61.163,6.375 61.163,13.03 72.615,24.482 J302.8
"GREEN LED": 3v3.1 B100.14 B101.5 B102.5 B103.5 B300.1 B301.6 B302.6 C202.1 C203.1 C208.1 C300.2 C301.1 D100.5 D200.1 D200.3 DARR100.1 DARR101.1 DARR102.1 J300.4 J301.4 J302.7 R202.2 R301.2 R302.2 R303.2 U200.1 U200.3 U200.4 U200.19 U200.37 U200.43 U200.46 U202.7 U202.8 | length 296.2
  Top Layer w0.254: D100.5 19.99,38.805 20.119,38.675 B102.5 ; B101.5 26.365,42.774 26.365,40.409 B103.5 24.999,38.075 21.275,38.075 B102.5 ; C208.1 29.834,22.301 33.528,22.301 34.544,23.317 ; 30.525,24.384 U202.7 U202.8 ; DARR102.1 34.138,39.875 35.941,38.072 DARR100.1@35.941,36.625 ; U200.19 39.369,26.725 40.819,25.275 v3(41.725,25.275) 42.49,25.275 C203.1 ; v2(42.164,22.123) 42.885,21.402 C202.1 42.885,20.32 42.101,19.536 35.56,19.536 34.544,20.552 ; R202.2 44.125,23.675 44.125,7.6 42.672,6.147 40.132,6.147 34.544,11.735 34.544,18.288 ; 44.337,32.868 54.388,32.868 56.159,34.639 56.159,40.767 55.88,41.046 ; D200.3 D200.1 ; C300.2 59.915,41.9 J300.4 66.86,41.9 C301.1 69.51,41.285 ; B301.6 60.525,50.45 60.425,50.55 60.425,51.2 60.075,51.55 57.999,51.55 57.85,51.401 57.85,50.912 56.537,49.6 B300.1 53.95,50.368 53.594,50.724 48.377,50.724 43.9,46.247 B100.14 43.9,44.066 41.808,41.975 DARR101.1 41.238,41.975 40.919,41.656 40.919,41.199 36.346,36.625 DARR100.1 DARR100.1@35.941,36.625 ; B302.6 61.214,33.4 61.214,36.527 61.468,36.781 68.248,36.781 68.326,36.703 69.644,36.703 70.025,37.084 R302.2 ; v2(63.906,22.936) 63.906,19.675 J301.4 ; J302.7 69.475,30.395 R301.2 71.247,36.572 71.247,40.894 70.866,41.275 R303.2 70.282,41.275 ; B102.5 20.675,35.121 3v3.1 21.273,31.801 18.898,31.801 17.242,30.145 17.242,19.08 19.05,17.272 33.528,17.272 34.544,18.288 ; 34.544,18.288 34.544,20.552 ; 34.544,20.552 34.544,23.317 ; 34.544,23.317 34.544,25.019 34.544,25.489 34.228,25.805 34.228,28.465 34.544,28.781 34.544,35.609 35.56,36.625 DARR100.1@35.941,36.625 ; D200.1 51.1,41.046 52.832,41.046 ; D200.1 52.273,39.9 52.273,40.488 52.832,41.046 ; 52.832,41.046 55.88,41.046 ; 55.88,41.046 56.82,41.046 58.852,39.014 66.624,39.014 66.7,39.091 68.097,39.091 69.901,40.894 ; 69.51,41.285 70.271,41.285 70.282,41.275 ; 69.51,41.285 69.901,40.894 ; 69.901,38.278 69.901,37.55 R302.2 ; 69.901,38.278 69.901,40.894 ; 69.901,38.278 70.025,38.154 R302.2 ; 69.901,40.894 70.282,41.275
  Layer 2 w0.254: v2(42.164,22.123) 62.403,22.123 64.999,24.719 ; v2(63.906,22.936) 64.999,24.028 64.999,24.719 ; J302.7 64.999,24.719
NetB101_4: B101.4 Q101.1 | length 6.2
  Top Layer w0.254: B101.4 27.209,44.074 v2(28.321,45.187) ; v2(30.429,43.84) 30.514,43.925 Q101.1
  Bottom Layer w0.254: v2(28.321,45.187) 29.667,43.84 v2(30.429,43.84)
NetB103_4: B103.4 Q102.1 | length 11.2
  Top Layer w0.254: B103.4 28.45,39.139 v2(32.286,39.139) ; Q102.1 35.625,42.404 v2(36.297,41.732)
  Layer 2 w0.254: v2(32.286,39.139) 33.703,39.139 v2(36.297,41.732)
NetB104_1: B104.1 C101.2 | length 13.1
  Top Layer w0.254: B104.1 21.336,25.5 21.031,25.805 21.031,28.042 21.336,28.346 22.909,28.346 25.297,30.734 27.28,30.734 27.534,30.988 27.534,32.106 27.179,32.46 C101.2
NetB104_3: B104.3 R103.1 R104.2 | length 9.7
  Top Layer w0.254: B104.3 22.725,27.4 25.4,30.075 R104.2 28.525,30.075 R103.1
NetB104_6: B104.6 C101.1 L100.2 | length 16.6
  Top Layer w0.254: B104.6 20.268,25.5 20.523,25.756 20.523,29.263 25.594,34.334 L100.2 26.111,33.664 26.111,31.845 26.416,31.54 C101.1
NetB105_1: B105.1 C104.2 | length 8.9
  Top Layer w0.254: C104.2 16.039,52.864 19.506,52.864 20.3,52.07 B105.1
NetB105_3: B105.3 R100.2 R101.1 | length 4.9
  Top Layer w0.254: R101.1 17.374,48.275 18.4,49.301 B105.3 18.425,50.15 18.425,51.675 R100.2
NetB105_4: B105.4 B105.5 C103.1 J100.A4 J100.A9 J100.B4 J100.B9 | length 18.4
  Top Layer w0.254: J100.A9 J100.B4 9.487,41.15 8.929,41.708 8.929,44.842 9.411,45.324 9.559,45.324 J100.B9 J100.A4 11.038,45.452 13.322,45.452 C103.1 16.55,45.505 17.934,46.888 19.35,46.888 B105.5 B105.4
NetB105_6: B105.6 C104.1 L101.1 | length 16.1
  Top Layer w0.254: L101.1 14.217,50.008 14.217,50.247 13.663,50.801 13.663,51.042 C104.1 13.48,51.816 15.036,53.372 20.161,53.372 21.006,52.527 21.006,49.093 20.3,48.387 B105.6
NetB106_1: B106.1 C107.2 | length 3.4
  Top Layer w0.254: B106.1 27.565,51.615 C107.2
NetB106_3: B106.3 R102.1 R105.2 | length 22.9
  Top Layer w0.254: v2(25.425,48.184) 26.092,48.85 B106.3 ; R102.1 31.5,47.015 34.541,47.015 R105.2 35.328,47.803 35.56,47.803 v2(37.287,49.53)
  Layer 2 w0.254: v2(25.425,48.184) 25.425,47.752 26.441,46.736 34.493,46.736 v2(37.287,49.53)
NetB106_6: B106.6 C107.1 L102.2 | length 5.7
  Top Layer w0.254: C107.1 28.485,51.465 B106.6 30.378,50.75 30.385,50.743 L102.2
NetB300_2: B300.2 R300.1 U200.5 | length 4.9
  Top Layer w0.254: B300.2 51.65,47.25 R300.1
NetB301_4: B301.4 J300.1 J301.1 J302.14 R301.1 U200.22 | length 61.4
  Top Layer w0.254: J302.14 61.146,5.664 62.992,5.664 63.779,6.452 63.779,8.103 64.008,8.331 64.008,13.675 J301.1 ; J300.1 65.43,35.9 v2(65.43,32.156) ; R301.1 68.758,31.389 v2(68.758,23.952)
  Layer 3 w0.254: J302.14 59.915,20.977 63.729,24.79 ; v2(65.43,32.156) 63.729,30.455 63.729,24.79 ; v2(68.758,23.952) 67.428,22.623 65.896,22.623 63.729,24.79
NetB301_5: B301.5 J300.2 J301.2 J302.13 R302.1 U200.21 | length 57.4
  Top Layer w0.254: J302.13 53.675,15.675 ; J301.2 53.675,15.675 ; J300.2 J300.2@64.643,37.9 ; R302.1 68.786,37.211 68.708,37.289 64.643,37.289 J300.2@64.643,37.9 ; 53.675,15.675 53.629,15.721 53.629,31.201 60.328,37.9 J300.2@64.643,37.9
NetB302_1: B302.1 J302.3 U200.34 | length 8.8
  Top Layer w0.254: v2(56.041,31.589) 56.041,32.648 56.794,33.4 B302.1
  Layer 2 w0.254: v2(56.041,31.589) 58.121,31.589 J302.3
NetB302_3: B302.3 J302.6 R304.2 U200.36 | length 16.9
  Top Layer w0.254: B302.3 59.233,32.1 59.233,31.75 59.588,31.394 60.452,31.394 61.189,30.658 61.189,27.432 62.814,25.806 66.7,25.806 66.7,26.251 R304.2 67.535,27.085 J302.6
NetB302_4: B302.4 J302.4 U200.35 | length 3.5
  Top Layer w0.254: B302.4 61.499,32.1 61.849,31.75 61.849,30.401 J302.4
NetB302_5: B302.5 R303.1 | length 18.1
  Top Layer w0.254: B302.5 61.747,32.75 63.433,31.064 66.243,31.064 67.776,32.597 67.776,35.096 68.58,35.899 69.808,35.899 70.688,36.779 70.688,40.261 R303.1
NetC201_1: C201.1 E200.3 L200.2 | length 6.8
  Top Layer w0.254: E200.3 68.96,51.8 69.966,50.794 71.045,50.794 L200.2 72.847,49.735 72.847,49.1 73.152,48.795 C201.1@73.554,48.795
NetC205_1: C205.1 R202.1 R203.1 SW200.2 | length 21.6
  Top Layer w0.254: R203.1 38.347,25.171 39.624,25.171 40.135,24.66 C205.1 42.216,23.55 42.342,23.675 R202.1 43,23.338 43.586,22.752 43.586,16.129 41.478,14.021 41.478,11.4 SW200.2
NetC206_1: C206.1 C207.1 R205.1 U202.5 U202.6 | length 8.3
  Top Layer w0.254: C206.1 C207.1 27.835,25.515 29.947,23.404 ; U202.6 29.947,25.275 29.947,23.404 ; R205.1 29.947,23.404
NetC206_2: C206.2 C207.2 C208.2 U202.2 | length 8.6
  Top Layer w0.254: C207.2 C206.2 24.632,26.435 24.359,26.162 24.359,24.74 26.148,22.95 C208.2
NetC209_1: C209.1 U202.16
NetD200_2: D200.2 R201.1 | length 44.5
  Top Layer w0.254: R201.1 40.125,20.32 39.849,20.044 36.319,20.044 35.204,21.158 35.204,25.547 34.736,26.016 34.736,28.254 35.204,28.723 35.204,33.172 35.966,33.934 51.816,33.934 54.788,36.906 55.651,36.906 55.651,39.624 55.375,39.9 D200.2
NetD200_4: D200.4 R204.1 | length 5.3
  Top Layer w0.254: R204.1 51.15,35.86 53.34,38.05 D200.4
NetJ302_5: J302.5 R304.1 U200.38 | length 3.7
  Top Layer w0.254: J302.5 66.025,28.765 R304.1
NetQ200_1: Q200.1 R200.1 | length 6.8
  Top Layer w0.254: R200.1 43.525,38.049 46.551,38.049 Q200.1
NetQ200_3: Q200.3 R204.2 | length 3.8
  Top Layer w0.254: Q200.3 49.925,34.925 R204.2
NetU200_41: U200.41 U202.20
SIO0: U200.33 U201.5 | length 3.3
  Top Layer w0.254: U200.33 44.652,31.175 44.907,31.43 U201.5
SIO1: U200.27 U201.2
SIO2: U200.32 U201.3
SIO3: U200.30 U201.7 | length 3.5
  Top Layer w0.254: U200.30 44.215,29.675 45,28.89 U201.7
SRAM_CE: U200.29 U201.1
"UART DETECT": R200.2 U200.40 U202.21
VDD_SDIO: C204.1 SDIO.1 U200.26 U201.8 | length 65.6
  Top Layer w0.254: U201.8 46.736,27.62 48.514,29.398 48.514,31.039 49.784,32.309 52.68,32.309 52.781,32.207 52.781,11.709 56.058,8.433 56.058,6.35 55.372,5.664 49.174,5.664 48.87,5.969 48.87,21.66 C204.1 49.083,22.715 47.425,21.057 SDIO.1
VIO: R205.2 U202.9
pads on no net: B100.1 B100.2 B100.3 B100.4 B100.5 B100.6 B100.8 B100.9 B301.3 B301.8 B301.9 B301.10 C109.1 C109.2 D100.1 E200.1 E200.4 J100.A5 J100.A8 J100.B5 J100.B6 J100.B7 J100.B8 J302.1 J302.2 J302.9 J302.10 J302.11 J302.12 J302.15 U200.6 U200.7 U200.8 U200.10 U200.12 U200.13 U200.14 U200.15 U200.16 U200.17 U200.18 U200.20 U200.24 U200.25 U200.28 U200.39 U200.42 U200.44 U200.45 U200.47 U200.48 U202.1 U202.10 U202.11 U202.12 U202.13 U202.14 U202.15 U202.17 U202.18 U202.19 U202.22 U202.23 U202.24 U202.25
copper on no net: | length 1.7
  Top Layer w0.254: 13.4,32.15 13.432,32.118 15.075,32.118 v3(15.107,32.085)
  other v1: 31.225,25.975 32.325,25.975 31.225,27.075 32.325,27.075
  other v3: 67.925,16.925 32.525,23.5 23.475,30.15 54.525,34.85 56.175,43.525

## Polygon pours and split planes (outlines as drawn)
"GREEN LED" on Top Layer "NONET_L-01_P-001" (hatched Horizontal grid 0.508 track 0.203, pour order 3): 4.325,54.9 4.375,54.85 4.375,4.925 74.3,4.925 74.325,4.95 74.325,45.925 61.975,45.925 61.95,45.95 62.35,46.35 62.35,54.95 4.425,54.95 4.4,54.925
"GREEN LED" on Top Layer "NONET_L-01_P-001" (solid, pour order 2): 47.45,37.975 47.4,37.925 47.275,37.925
GND on Bottom Layer "NONET_L-01_P-001" (solid, pour order 4): 4.375,54.85 4.375,4.925 74.3,4.925 74.325,4.95 74.325,45.925 61.975,45.925 62.35,46.3 62.35,54.95 4.475,54.95
no net on Layer 2 "NONET_L-01_P-001" (solid, pour order 5): 4.475,54.95 4.375,54.85 4.375,4.925 74.3,4.925 74.325,4.95 74.325,45.925 62.45,45.925 62.375,45.85 62.35,45.875 62.35,54.95
no net on Layer 3 "NONET_L-01_P-001" (solid, pour order 6): 4.325,54.9 4.375,54.85 4.375,4.925 74.3,4.925 74.325,4.95 74.325,45.925 62.45,45.925 62.375,45.85 62.35,45.875 62.35,54.95 4.475,54.95

## Silkscreen, mask and mechanical layers (free items; w line width, h text height)
Top Overlay:
  text "YNOV / Equipe 2" at 4.575,50.825 h2.5

## Text inside footprints (layer, text, board x,y; h text height)
J100: Mechanical 13 "PCB EDGE" at 5.11,36.7 h0.81
LS200: Top Overlay "+" at 23,5.075 h1.27 r90; Top Overlay "-" at 23,20.275 h1.27 r90; Mechanical 13 "+" at 23,5.075 h1.27 r90; Mechanical 13 "-" at 23,20.275 h1.27 r90
Q100: Mechanical 9 "SOT-723" at 19.959,42.675 h0.5
Q101: Mechanical 9 "SOT-723" at 31.726,45.191 h0.5 r270
Q102: Mechanical 9 "SOT-723" at 34.359,43.125 h0.5
Q200: Mechanical 9 "SOT-23" at 48.041,36.225 h0.5 r180